# Altium PCB bh_carrier_0_beta.PcbDoc (part 2 of 2)
Units mm, origin at the board's own origin, x right, y up, seen from the top; angles counter-clockwise.
Board outline 100 x 60 mm, 2 copper layers (Top Layer, Bottom Layer); 128 components, 129 nets, 524 pads, 190 vias.
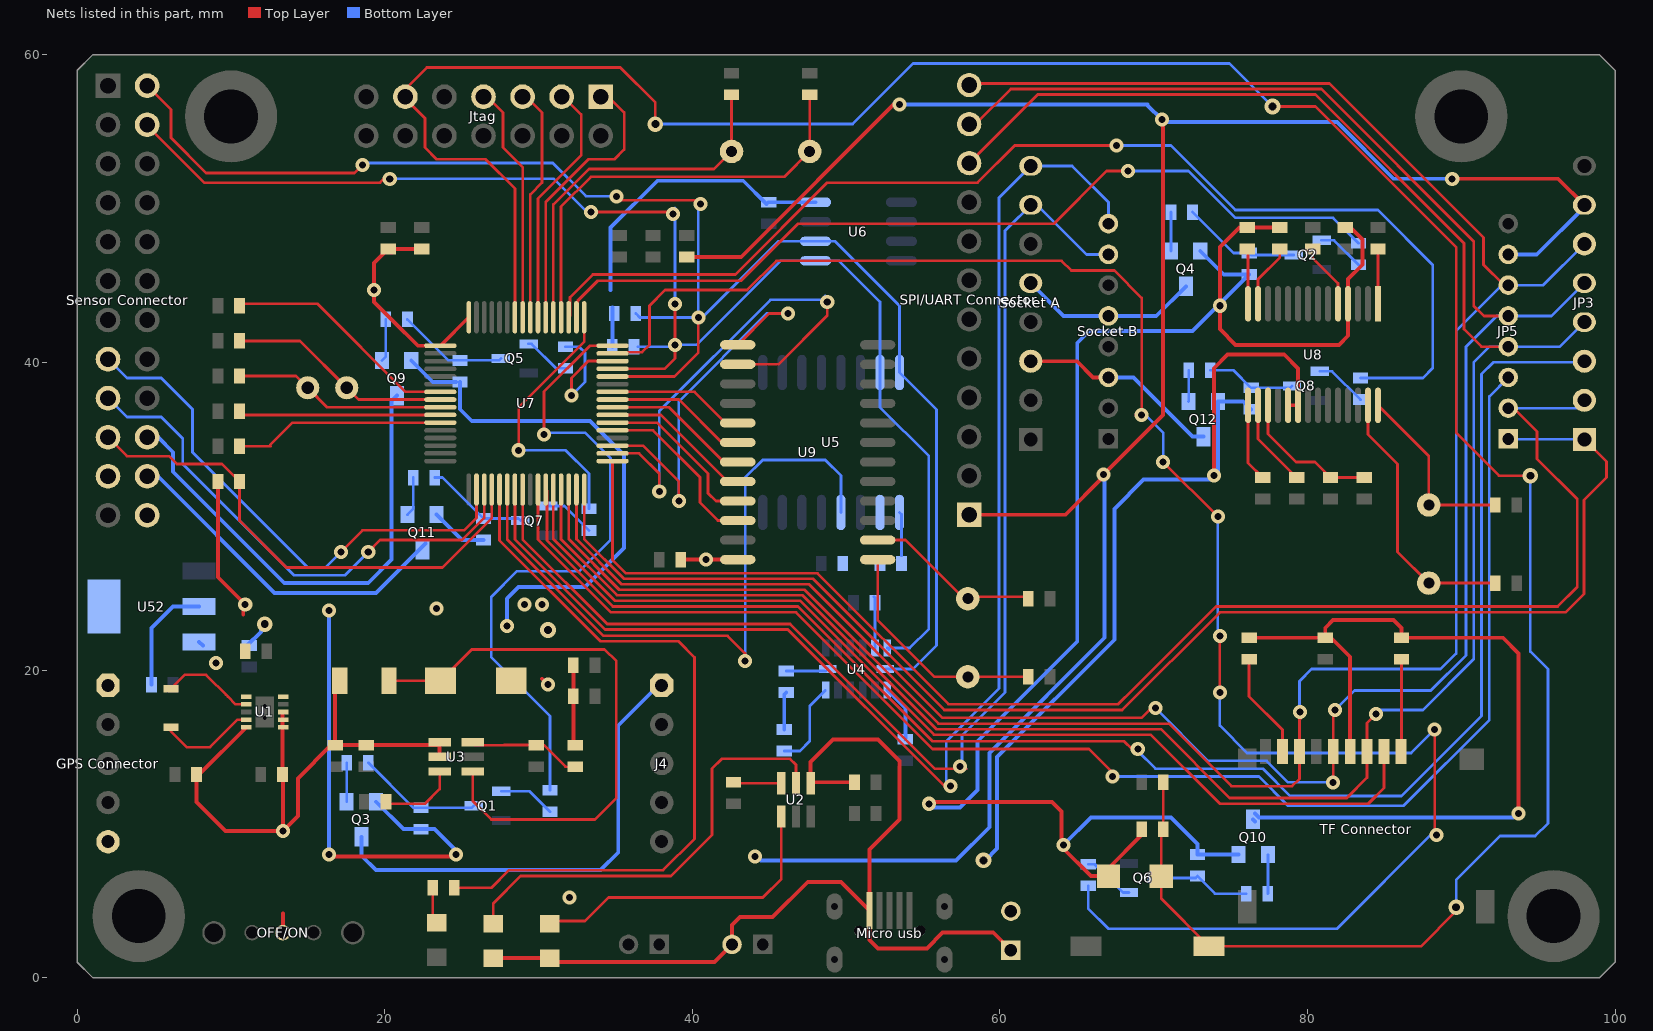
[diagram p2: the nets of this part, all layers, seen from the top]

## Via types
v1: diameter 0.914, hole 0.457, Top Layer to Bottom Layer, 171 vias
v2: diameter 1.016, hole 0.508, Top Layer to Bottom Layer, 17 vias
v3: diameter 1, hole 1, Top Layer to Bottom Layer, 2 vias

## Nets (pads, with @x,y where several pads share a name; then routed paths per layer and width w, separated by ;. In a path a pad name is that pad's centre, name@x,y a point inside that pad or via, vN(x,y) a via of type N, cw(c..) or ccw(c..) an arc to the next point about the centre after c; other vN are vias at no path point) (continued)
IO7: "Sensor Connector.15" U7.18 | length 34.4
  Top Layer w0.178: v1(17.145,27.686) 18.542,29.083 25.146,29.083 25.96,29.897 U7.18@25.96,31.738
  Bottom Layer w0.178: 2,40.22 3.231,38.989 5.461,38.989 7.493,36.957 7.493,34.163 14.986,26.67 16.129,26.67 v1(17.145,27.686)
IO8: "Sensor Connector.17" U7.19 | length 33.6
  Top Layer w0.178: v1(18.923,27.686) 19.685,28.448 25.019,28.448 26.46,29.889 U7.19@26.46,31.738
  Bottom Layer w0.178: 2,37.68 3.231,36.449 5.461,36.449 6.858,35.052 6.858,33.401 14.097,26.162 17.399,26.162 v1(18.923,27.686)
IO_0: "Socket A.7" "Socket B.7" U7.24 | length 83.7
  Top Layer w0.178: U7.24@28.96,31.738 28.96,28.49 34.463,22.987 46.355,22.987 55.753,13.589 v1@57.785,13.589
  Bottom Layer w0.178: v1(57.404,13.716) v1@57.658,13.716 ; v1@57.785,13.589 57.531,13.843 57.531,15.748 60.325,18.542 60.325,48.565 62.205,50.444 65.624,47.025 67.051,47.025
IO_1: "Socket A.8" "Socket B.8" U7.23 | length 89.2
  Top Layer w0.178: U7.23@28.46,31.738 28.46,28.487 34.316,22.631 46.203,22.631 56.388,12.446 v1@56.884,12.446 ; 62,52.484 62,52.78 62.296,52.78
  Bottom Layer w0.178: v1@56.896,12.319 56.515,12.7 56.515,15.367 59.944,18.796 59.944,48.443 59.933,48.454 59.933,50.713 62,52.78 64.695,52.78 67.056,50.419 67.056,49.025
  other v1: 56.769,12.446
LED1: R25.2 U7.21 | length 47.9
  Top Layer w0.178: R25.2@24.514,5.842 26.924,5.842 28.067,6.985 38.1,6.985 40.132,9.017 40.132,20.828 39.091,21.869 34.011,21.869 27.46,28.42 U7.21@27.46,31.738
NetC11_2: C11.2 U7.52 XT1.1 | length 28.8
  Top Layer w0.178: U7.52@31.46,42.938 31.46,50.129 33.401,52.07 45.974,52.07 XT1.1@47.625,53.721 ; XT1.1@47.625,53.47 XT1.1@47.625,53.721 ; C11.2@47.625,57.404 C11.2@47.625,57.401 XT1.1@47.625,53.721
NetC13_2: C13.2 U7.53 XT1.2 | length 24.3
  Top Layer w0.178: U7.53@30.96,42.938 30.96,50.264 33.274,52.578 41.402,52.578 XT1.2@42.545,53.721 C13.2@42.545,57.401 C13.2@42.545,57.655
NetC15_1: 
NetC19_2: C19.2 U7.8 XT2.2 | length 14.8
  Top Layer w0.178: C19.2@10.544,41.656 10.798,41.402 14.478,41.402 XT2.2@17.526,38.354 18.292,37.588 U7.8@23.61,37.588
NetC21_2: C21.2 U7.9 XT2.1 | length 14.4
  Top Layer w0.178: C21.2@10.544,39.116 C21.2@10.798,39.37 ; C21.2@10.544,39.37 10.798,39.116 14.224,39.116 XT2.1@14.986,38.354 16.252,37.088 U7.9@23.61,37.088
NetC22_1: C22.1 U8.28 XT4.2 | length 12.2
  Top Layer w0.178: U8.28@84.582,37.215 87.884,33.913 XT4.2@87.884,30.734 C22.1@92.202,30.734
NetC23_1: C23.1 U9.1 XT3.2 | length 15.2
  Top Layer w0.178: U9.1@52.048,27.178 52.048,23.263 55.753,19.558 XT3.2@57.912,19.558 C23.1@61.846,19.558
NetC26_2: C26.2 U9.2 XT3.1 | length 11.4
  Top Layer w0.178: U9.2@52.048,28.448 53.848,28.448 57.658,24.638 XT3.1@57.912,24.638 58.039,24.765 C26.2@61.846,24.765
NetC28_1: C28.1 U8.27 XT4.1 | length 17.5
  Top Layer w0.178: U8.27@83.932,37.215 83.932,35.321 85.852,33.401 85.852,27.686 XT4.1@87.884,25.654 C28.1@92.202,25.654
NetC30_2: C30.2 R35.2 U8.17 | length 9.3
  Top Layer w0.178: U8.17@77.432,37.215 77.432,35.344 79.248,33.528 80.479,33.528 R35.2@81.492,32.515 C30.2@83.693,32.515
NetD1_K: D1.K U2.1 | length 20.5
  Top Layer w0.178: D1.K@30.734,3.505 30.912,3.683 33.02,3.683 34.544,5.207 44.577,5.207 45.786,6.416 U2.1@45.786,10.482 U2.1@45.786,10.277
NetD2_K: D2.K U2.5 | length 28.8
  Top Layer w0.178: D2.K@27.051,3.505 27.051,4.826 28.829,6.604 38.608,6.604 41.275,9.271 41.275,13.589 41.91,14.224 46.355,14.224 46.736,13.843 U2.5@46.736,12.632
NetD3_1: D3.1 L2.2 U3.1 | length 37.2
  Top Layer w0.178: L2.2@20.269,19.304 D3.1@23.622,19.304 25.654,21.336 34.29,21.336 35.052,20.574 35.052,11.684 33.655,10.287 26.924,10.287 25.713,11.498 U3.1@25.713,13.401
NetD4_A: D4.A R25.1 | length 2.4
  Top Layer w0.178: R25.1@23.114,5.842 23.114,3.81 D4.A@23.368,3.556
NetL1_1: L1.1 U1.2 | length 6.3
  Top Layer w0.178: L1.1@6.098,18.781 6.098,18.798 6.985,19.685 8.382,19.685 9.796,18.271 ; 9.652,18.415 9.796,18.271 ; U1.2@10.99,17.772 10.295,17.772 9.796,18.271
NetL1_2: L1.2 U1.4 | length 6.3
  Top Layer w0.178: L1.2@6.094,16.271 6.094,16.004 7.112,14.986 8.636,14.986 10.422,16.772 U1.4@10.99,16.772
NetQ1_1: Q1.1 R5.2 | length 3.7
  Bottom Layer w0.178: Q1.1@27.576,12.12 29.406,12.12 R5.2@30.74,10.786
NetQ1_3: Q1.3 R1.2 R3.2 | length 8.5
  Bottom Layer w0.178: R1.2@18.926,13.97 21.844,11.052 R3.2@22.352,11.052 ; R3.2@21.971,11.052 R3.2@22.352,11.052 ; Q1.3@25.776,11.17 25.658,11.052 22.86,11.052 22.479,11.052 R3.2@22.352,11.052
NetQ2_1: Q2.1 R6.2 | length 3.1
  Bottom Layer w0.178: Q2.1@80.91,47.94 81.724,47.94 R6.2@83.312,46.352
NetQ2_3: Q2.3 R2.2 R4.2 | length 7.7
  Bottom Layer w0.178: R2.2@72.526,49.778 75.184,47.12 R4.2@76.2,47.12 76.33,46.99 Q2.3@79.11,46.99
NetQ3_1: Q3.1 R1.1 | length 2.5
  Bottom Layer w0.178: Q3.1@17.52,11.436 17.526,11.442 R1.1@17.526,13.97
NetQ4_1: Q4.1 R2.1 | length 2.5
  Bottom Layer w0.178: Q4.1@71.12,47.244 71.12,49.772 R2.1@71.126,49.778
NetQ5_1: Q5.1 R19.2 | length 3.1
  Bottom Layer w0.178: Q5.1@29.348,41.209 29.53,41.209 31.118,39.621 R19.2@31.75,39.621
NetQ5_3: Q5.3 R10.2 R15.2 | length 7.2
  Bottom Layer w0.178: R10.2@21.466,42.799 24.13,40.135 R15.2@24.892,40.135 27.424,40.135 Q5.3@27.548,40.259
NetQ6_1: Q6.1 R20.2 | length 3.4
  Bottom Layer w0.178: R20.2@65.735,7.369 66.164,7.369 68.006,5.527 Q6.1@68.391,5.527
NetQ6_3: Q6.3 R11.2 R16.2 | length 6.4
  Bottom Layer w0.178: Q6.3@70.191,6.477 72.723,6.477 R16.2@72.847,6.601 73.987,5.461 R11.2@76.019,5.461
NetQ7_1: Q7.1 R21.2 | length 3.3
  Bottom Layer w0.178: Q7.1@30.618,30.668 31.686,30.668 R21.2@33.274,29.08
NetQ7_3: Q7.3 R12.2 R17.2 | length 6.9
  Bottom Layer w0.178: R12.2@23.244,32.512 23.752,32.512 R17.2@26.416,29.848 28.688,29.848 Q7.3@28.818,29.718 ; Q7.3@28.942,29.848 Q7.3@29.072,29.718
NetQ8_1: Q8.1 R22.2 | length 3.4
  Bottom Layer w0.178: Q8.1@80.789,39.425 81.603,39.425 R22.2@83.445,37.583
NetQ8_3: Q8.3 R13.2 R18.2 | length 5.8
  Bottom Layer w0.178: R13.2@73.669,39.491 75.193,39.491 R18.2@76.333,38.351 78.865,38.351 Q8.3@78.989,38.475
NetQ9_1: Q9.1 R10.1 | length 2.8
  Bottom Layer w0.178: Q9.1@19.812,40.132 20.066,40.386 R10.1@20.066,42.799
NetQ10_1: Q10.1 R11.1 | length 2.5
  Bottom Layer w0.178: R11.1@77.419,5.461 77.425,5.467 Q10.1@77.425,7.995
NetQ11_1: Q11.1 R12.1 | length 2.6
  Bottom Layer w0.178: Q11.1@21.468,30.105 21.844,30.481 R12.1@21.844,32.512
NetQ12_1: Q12.1 R13.1 | length 2
  Bottom Layer w0.178: Q12.1@72.263,37.465 72.269,37.471 R13.1@72.269,39.491
NetR7_2: R7.2 U2.6 | length 3.1
  Top Layer w0.178: R7.2@42.672,12.703 42.743,12.632 U2.6@45.786,12.632
NetR14_1: R14.1 R24.2 U3.3 | length 7.3
  Top Layer w0.178: U3.3@25.713,15.301 25.898,15.116 27.736,15.116 27.746,15.126 29.835,15.126 R24.2@29.845,15.116 30.35,15.116 31.75,13.716 R14.1@32.385,13.716
NetR23_2: R23.2 U3.6 | length 5
  Top Layer w0.178: R23.2@20.069,11.303 22.606,11.303 23.563,12.26 U3.6@23.563,13.401
NetR27_2: R27.2 U4.6 | length 5.6
  Bottom Layer w0.178: R27.2@45.974,14.729 46.987,14.729 47.625,15.367 47.625,17.647 U4.6@48.641,18.663
NetR28_1: R28.1 U5.1 | length 2.9
  Bottom Layer w0.178: U5.1@53.467,30.248 53.594,30.121 53.594,27.432
NetR29_1: R29.1 U4.12 | length 3.4
  Bottom Layer w0.178: R29.1@51.816,24.765 51.873,24.708 U4.12@51.873,21.437
NetR30_2: R30.2 U4.7 | length 2.8
  Bottom Layer w0.178: R30.2@46.101,19.942 48.678,19.942 U4.7@48.802,20.066
NetR33_1: R33.1 U8.1 | length 3.6
  Top Layer w0.178: U8.1@84.582,43.815 R33.1@84.582,47.371
NetR34_1: R34.1 U8.5 | length 4.2
  Top Layer w0.178: R34.1@80.328,47.371 80.328,46.799 81.982,45.145 U8.5@81.982,43.815
NetR37_1: R37.1 U8.13 | length 4.1
  Top Layer w0.178: U8.13@76.782,43.815 76.782,45.413 78.2,46.831 R37.1@78.2,47.371
NetR38_2: R38.2 U8.16 | length 5.7
  Top Layer w0.178: U8.16@76.782,37.215 76.782,35.023 R38.2@79.29,32.515
NetR39_1: R39.1 U8.14 | length 3.6
  Top Layer w0.178: R39.1@76.073,47.371 76.132,47.312 U8.14@76.132,43.815
NetR40_2: R40.2 U8.15 | length 5.1
  Top Layer w0.178: U8.15@76.132,37.215 76.132,33.472 R40.2@77.089,32.515
NetR41_2: "TF Connector.1" R41.2 | length 6
  Top Layer w0.178: 86.07,14.702 86.106,14.738 R41.2@86.106,20.698
NetR42_2: "TF Connector.8" R42.2 | length 6.9
  Top Layer w0.178: R42.2@76.2,20.698 76.2,18.288 78.37,16.118 78.37,14.702
ONE_WIRE: "Sensor Connector.19" R36.2 U7.20 | length 33.1
  Top Layer w0.178: 2,35.14 3.231,33.909 5.969,33.909 6.477,33.401 9.401,33.401 R36.2@10.544,32.258 10.544,29.715 13.589,26.67 23.749,26.67 26.96,29.881 U7.20@26.96,31.738
POWER_C0: R19.1 U7.46 | length 8.9
  Top Layer w0.178: v1(32.131,37.846) 32.131,38.989 33.23,40.088 U7.46@34.81,40.088
  Bottom Layer w0.178: R19.1@31.75,41.021 32.639,41.021 33.02,40.64 33.02,38.735 v1(32.131,37.846)
POWER_C1: R20.1 U7.47 | length 119.2
  Top Layer w0.178: U7.47@34.81,40.588 34.893,40.671 36.734,40.671 37.211,41.148 37.211,43.688 38.227,44.704 43.561,44.704 45.466,46.609 64.008,46.609 64.643,45.974 67.437,45.974 69.215,44.196 v1(69.215,36.576) v1@68.834,36.576 ; v1(70.612,33.528) v1(74.168,29.972) ; v1(74.295,18.542) v1(74.295,22.225) ; v1(88.265,16.129) 88.265,9.398 v1(88.392,9.271)
  Bottom Layer w0.178: R20.1@65.735,5.969 65.735,4.496 67.056,3.175 81.915,3.175 v1@88.201,9.461 ; v1(69.215,36.576) 69.469,36.576 70.612,35.433 v1(70.612,33.528) ; v1(74.168,29.972) 74.168,22.225 v1(74.295,22.225) ; v1(74.295,18.542) 74.295,16.383 76.073,14.605 86.741,14.605 v1(88.265,16.129)
POWER_C2: R5.1 U7.48 | length 43.3
  Top Layer w0.178: v1(30.353,35.306) 30.353,38.1 33.341,41.088 U7.48@34.81,41.088
  Bottom Layer w0.178: v1@30.353,35.433 33.02,35.433 34.671,33.782 34.671,28.448 32.639,26.416 28.575,26.416 26.924,24.765 26.924,20.828 30.74,17.012 30.74,13.462 ; R5.1@30.74,12.186 30.74,13.462 ; 30.74,14.472 30.74,13.462
POWER_C3: R21.1 U7.49 | length 18
  Top Layer w0.178: v1(28.702,34.29) 28.702,37.084 32.96,41.342 U7.49@32.96,42.938
  Bottom Layer w0.178: v1(28.702,34.29) 30.607,34.29 ; 30.48,34.29 30.607,34.29 ; R21.1@33.274,30.48 33.274,32.766 31.75,34.29 30.607,34.29
POWER_C4: R6.1 U7.50 | length 57.3
  Top Layer w0.178: U7.50@32.46,42.938 32.543,43.021 32.543,44.011 33.846,45.314 43.155,45.314 46.86,49.019 46.863,49.022 63.5,49.022 66.929,52.451 v1(68.326,52.451)
  Bottom Layer w0.178: v1(68.326,52.451) 72.263,52.451 75.311,49.403 81.661,49.403 R6.1@83.312,47.752
POWER_C5: R22.1 U7.51 | length 76.4
  Top Layer w0.178: U7.51@31.96,42.938 32.043,43.021 32.043,44.235 33.528,45.72 42.799,45.72 48.768,51.689 58.547,51.689 60.96,54.102 v1(67.564,54.102)
  Bottom Layer w0.178: v1(67.564,54.102) 71.115,54.102 75.306,49.911 84.582,49.911 88.138,46.355 88.138,39.624 87.497,38.983 R22.1@83.445,38.983
RST: C15.1 D5.1 Jtag.11 R26.1 Reset.2 U7.58 | length 177.6
  Top Layer w0.178: U7.58@28.46,42.938 28.46,51.309 26.556,53.213 23.368,53.213 22.606,53.975 22.606,55.88 21.018,57.468 22.733,59.182 35.306,59.182 37.592,56.896 v2(37.592,55.499) ; C15.1@70.612,12.7 R26.1@70.612,9.652 70.485,9.525 D5.1@70.485,6.604 70.485,5.143 Reset.2@73.596,2.032 87.376,2.032 89.662,4.318 v2(89.662,4.572) ; v2@77.597,56.515 v2(77.724,56.642) 80.518,56.642 89.662,47.498 89.662,35.433 92.456,32.639 v2(94.488,32.639)
  Bottom Layer w0.178: v2(37.592,55.499) 50.419,55.499 54.356,59.436 74.93,59.436 v2(77.724,56.642) ; v2(89.662,4.572) 89.662,6.35 92.513,9.201 94.799,9.201 95.631,10.033 95.631,20.066 94.488,21.209 v2(94.488,32.639)
RTC_RST: U5.4 U7.22 | length 43.7
  Top Layer w0.178: U7.22@27.96,31.738 27.96,28.484 34.219,22.225 42.291,22.225 43.434,21.082 v1(43.434,20.574)
  Bottom Layer w0.178: v1(43.434,20.574) 43.434,32.512 44.577,33.655 48.641,33.655 49.657,32.639 U5.4@49.657,30.248
RXD0: JP3.2 JP5.2 U7.33 | length 95.6
  Top Layer w0.178: U7.33@34.81,33.588 34.81,27.166 35.687,26.289 48.133,26.289 56.642,17.78 67.691,17.78 68.644,18.732 68.649,18.732 74.046,24.13 96.266,24.13 97.536,25.4 97.536,31.115 94.928,33.723 94.928,35.501 93.404,37.025 JP5.2@93.051,37.025
  Bottom Layer w0.178: JP5.2@93.051,37.025 94.615,37.025 ; 94.051,37.025 94.615,37.025 ; JP3.2@98,37.54 97.485,37.025 94.615,37.025
RXD1: U7.35 U9.13 | length 26.6
  Top Layer w0.178: U7.35@34.81,34.588 36.786,34.588 39.116,32.258 v1(39.116,30.988) ; U9.13@42.948,41.148 44.98,43.18 v1(46.228,43.18)
  Bottom Layer w0.178: v1(39.116,30.988) 39.116,37.465 44.831,43.18 v1(46.228,43.18)
SCL: "Sensor Connector.2" R32.1 U4.14 U5.16 U6.6 U7.44 | length 105.1
  Top Layer w0.178: 4.54,58 6.096,56.444 6.096,54.61 8.382,52.324 18.034,52.324 v1(18.542,52.832) ; U7.44@34.81,39.088 38.834,39.088 40.386,40.64 v1(40.386,42.926) ; v1(35.052,50.8) 35.306,50.546 40.386,50.546 40.513,50.419 v1(40.513,50.292)
  Bottom Layer w0.178: v1@18.682,52.972 30.921,52.972 33.08,50.813 35.039,50.813 v1(35.052,50.8) ; R32.1@36.322,43.18 36.576,42.926 v1(40.386,42.926) 40.386,50.546 40.513,50.419 v1(40.513,50.292) ; v1@40.513,42.799 45.593,47.879 U6.6@48.006,47.879 49.276,47.879 53.467,43.688 U5.16@53.467,39.348 55.88,36.935 55.88,21.59 54.356,20.066 U4.14@52.544,20.066
SCLK: "SPI/UART Connector.11" "TF Connector.5" JP3.5 JP5.5 U7.31 | length 149.2
  Top Layer w0.178: U7.31@32.46,31.738 32.46,28.51 35.392,25.578 47.574,25.578 56.261,16.891 69.215,16.891 69.85,17.526 v1(70.104,17.526) ; 58,55.498 58.419,55.498 60.706,57.785 80.899,57.785 90.805,47.879 90.805,43.688 91.468,43.025 JP5.5@93.051,43.025 ; v1(81.661,12.7) 81.67,12.709 81.67,14.702 81.67,17.027 81.915,17.272 v1(81.788,17.399) ; JP3.5@97.484,45.16 JP3.5@98,45.16
  Bottom Layer w0.178: v1(70.104,17.526) 73.533,14.097 77.343,14.097 78.74,12.7 v1(81.661,12.7) ; v1(81.788,17.399) 81.915,17.272 81.915,17.526 83.058,18.669 88.011,18.669 90.297,20.955 90.297,41.021 92.301,43.025 95.865,43.025 JP3.5@98,45.16
SD_CS: "TF Connector.2" U7.28 | length 67.2
  Top Layer w0.178: U7.28@30.96,31.738 30.96,28.502 34.951,24.511 46.99,24.511 55.702,15.799 69.799,15.799 74.295,11.303 83.947,11.303 84.97,12.326 84.97,14.702
SDA: "Sensor Connector.4" R31.1 U4.13 U5.15 U6.5 U7.45 | length 97.7
  Top Layer w0.178: 4.54,55.46 4.54,55.404 8.255,51.689 19.685,51.689 20.193,52.197 20.32,52.07 v1(20.32,51.943) ; v1(33.401,49.784) 33.401,50.038 33.655,49.784 38.862,49.784 v1(38.735,49.657) ; U7.45@34.81,39.588 38.191,39.588 38.862,40.259 v1(38.862,41.148) v1(38.862,43.802)
  Bottom Layer w0.178: v1@20.193,52.197 20.447,51.943 30.988,51.943 33.147,49.784 33.401,50.038 v1(33.401,49.784) ; v1(20.32,51.943) v1@20.32,52.07 ; R31.1@36.449,41.021 38.735,41.021 v1(38.862,41.148) 40.259,41.148 45.72,46.609 U6.5@48.006,46.609 49.53,46.609 52.197,43.942 U5.15@52.197,39.348 52.197,37.084 55.372,33.909 55.372,22.681 54.128,21.437 U4.13@52.673,21.437 U4.13@52.774,21.336 ; v1(38.862,43.802) v1@38.862,50.038
SIMO: "SPI/UART Connector.10" "TF Connector.3" JP3.4 JP5.4 U7.29 | length 150
  Top Layer w0.178: U7.29@31.46,31.738 31.46,28.504 35.098,24.867 47.142,24.867 55.855,16.154 70.46,16.154 74.93,11.684 82.55,11.684 83.87,13.004 83.87,14.702 ; 58,52.958 62.459,57.417 80.505,57.417 90.17,47.752 90.17,42.164 91.309,41.025 JP5.4@93.051,41.025 ; 83.947,14.779 83.87,14.702 ; v1(84.455,17.145) 83.87,16.56 83.87,14.702
  Bottom Layer w0.178: v1(84.455,17.145) 84.709,17.399 87.503,17.399 90.805,20.701 90.805,40.005 91.825,41.025 96.405,41.025 JP3.4@98,42.62
SOCKET0_CS: JP3.3 U7.27 | length 102.5
  Top Layer w0.178: U7.27@30.46,31.738 30.543,31.655 30.543,28.415 34.829,24.13 46.858,24.13 55.621,15.367 68.072,15.367 68.58,14.859 v1(68.961,14.859)
  Bottom Layer w0.178: v1(68.961,14.859) 68.961,14.732 70.104,13.589 77.089,13.589 78.867,11.811 86.106,11.811 91.313,17.018 91.313,39.243 92.075,40.005 97.925,40.005 JP3.3@98,40.08
SOCKET1_CS: JP5.3 U7.26 | length 97.6
  Top Layer w0.178: U7.26@29.96,31.738 29.96,28.496 34.707,23.749 46.736,23.749 55.626,14.859 65.786,14.859 67.31,13.335 v1(67.31,13.081)
  Bottom Layer w0.178: v1(67.31,13.081) 76.835,13.081 78.74,11.176 86.233,11.176 91.821,16.764 91.821,29.083 ; 91.821,29.21 91.821,29.083 ; JP5.3@93.051,39.025 91.821,37.796 91.821,29.083
SOMI: "SPI/UART Connector.12" "TF Connector.7" JP3.6 JP5.6 U7.30 | length 149.1
  Top Layer w0.178: U7.30@31.96,31.738 31.96,28.507 35.245,25.222 47.295,25.222 56.007,16.51 70.993,16.51 75.057,12.446 78.994,12.446 79.47,12.922 79.47,14.702 ; 58,58.038 58.102,58.141 81.432,58.141 91.44,48.133 91.44,46.355 92.77,45.025 JP5.6@93.051,45.025 ; 79.502,14.734 79.47,14.702 ; v1(79.502,17.272) 79.502,16.828 79.47,16.796 79.47,14.702
  Bottom Layer w0.178: v1(79.502,17.272) 79.502,16.828 79.47,16.796 79.47,19.272 80.264,20.066 88.646,20.066 89.662,21.082 89.662,42.037 92.65,45.025 95.325,45.025 JP3.6@98,47.7
SRADD0: U7.40 U9.19 | length 9.6
  Top Layer w0.178: U7.40@34.81,37.088 38.477,37.088 42.037,33.528 U9.19@42.948,33.528
SRADD1: U7.41 U9.18 | length 9.3
  Top Layer w0.178: U7.41@34.81,37.588 39.12,37.588 41.91,34.798 U9.18@42.948,34.798
SRADD2: U7.42 U9.17 | length 9
  Top Layer w0.178: U7.42@34.81,38.088 40.144,38.088 42.164,36.068 U9.17@42.948,36.068
STADD0: U7.37 U9.22 | length 11.5
  Top Layer w0.178: U7.37@34.81,35.588 37.437,35.588 40.488,32.537 40.488,32.125 40.488,31.299 40.488,30.886 41.656,29.718 U9.22@42.948,29.718
STADD1: U7.38 U9.21 | length 11
  Top Layer w0.178: U7.38@34.81,36.088 37.699,36.088 41.021,32.766 41.021,31.496 41.529,30.988 U9.21@42.948,30.988
STADD2: U7.39 U9.20 | length 9.9
  Top Layer w0.178: U7.39@34.81,36.588 37.961,36.588 42.291,32.258 U9.20@42.948,32.258
TCK: Jtag.7 U7.57 | length 15.9
  Top Layer w0.178: Jtag.7@26.416,57.785 26.416,57.531 27.686,56.261 27.686,53.975 28.96,52.701 U7.57@28.96,42.938
TDI: Jtag.3 U7.55 | length 16.5
  Top Layer w0.178: U7.55@29.96,42.938 29.96,50.661 32.766,53.467 32.766,56.134 31.496,57.404 Jtag.3@31.496,57.785
TDO: Jtag.1 U7.54 | length 18.6
  Top Layer w0.178: U7.54@30.46,42.938 30.46,50.419 33.254,53.213 34.925,53.213 35.56,53.848 35.56,56.261 Jtag.1@34.036,57.785
TMS: Jtag.5 U7.56 | length 15.7
  Top Layer w0.178: Jtag.5@28.956,57.785 28.956,57.531 30.226,56.261 30.226,51.693 29.46,50.927 U7.56@29.46,42.938
TXD0: JP3.1 JP5.1 U7.32 | length 92.2
  Top Layer w0.178: U7.32@32.96,31.738 32.96,28.513 35.54,25.933 47.848,25.933 56.383,17.399 67.945,17.399 74.295,23.749 96.774,23.749 97.975,24.95 97.975,31.046 99.441,32.512 99.441,33.559 JP3.1@98,35 JP3.1@97.975,35.025
  Bottom Layer w0.178: JP5.1@93.051,35.025 93.076,35 JP3.1@98,35
TXD1: U7.34 U9.14 | length 31.8
  Top Layer w0.178: U7.34@34.81,34.088 36.524,34.088 37.846,32.766 v1(37.846,31.623) ; U9.14@42.948,39.878 45.593,39.878 48.768,43.053 v1(48.768,43.942)
  Bottom Layer w0.178: 37.846,32.131 37.846,36.83 45.085,44.069 48.387,44.069 48.641,44.323 48.768,44.196 v1(48.768,43.942)
VBUS: "GPS Connector.5" "Sensor Connector.21" "SPI/UART Connector.1" C4.2 C5.2 C9.1 C10.1 JP3.7 JP5.7 L2.1 OFF/ON.2 R8.2 U1.5 U1.6 U1.7 U1.8 U3.4 U3.5 | length 189.5
  Top Layer w0.254: 2,32.48 2,32.6 2.198,32.6 ; U1.5@10.99,16.272 7.926,13.208 C5.2@7.75,13.208 7.75,11.427 9.652,9.525 v1(13.367,9.525) ; OFF/ON.2@13.367,2.921 13.367,4.159 ; U1.8@13.394,17.272 13.338,17.216 C4.2@13.338,13.208 13.367,13.179 v1(13.367,9.525) ; L2.1@17.069,19.304 16.764,18.999 C9.1@16.764,15.113 ; U3.5@23.563,14.351 U3.4@23.563,15.301 23.375,15.113 C10.1@18.796,15.113 C9.1@16.764,15.113 ; R8.2@39.624,46.86 43.177,46.86 v1@53.086,56.769 ; 58,30.098 64.261,30.098 v1@66.738,32.575 ; v1(66.738,32.702) 70.612,36.576 v1@70.612,55.793 ; v1(89.408,51.943) 96.297,51.943 JP3.7@98,50.24 JP3.7@97.484,50.24 ; v1(13.367,9.525) 14.351,10.509 14.351,12.954 16.51,15.113 C9.1@16.764,15.113
  Bottom Layer w0.254: OFF/ON.2@13.367,2.921 OFF/ON.2@13.367,3.207 ; 44.45,7.62 57.15,7.62 59.309,9.779 59.309,14.605 66.802,22.098 v1@66.802,32.637 ; v1(53.467,56.769) 69.596,56.769 69.596,56.721 v1(70.525,55.793) 70.691,55.626 81.915,55.626 85.598,51.943 v1(89.408,51.943) ; JP5.7@93.051,47.025 94.904,47.025 98,50.121 JP3.7@98,50.24
  other v1: 32.004,5.207 44.069,7.874
VCC_BASE_3.3V: C1.1 C12.1 C14.1 C16.1 C17.1 C18.1 C27.2 C29.1 C142.1 D5.2 Q3.2 Q4.2 Q10.2 Q11.2 R3.1 R4.1 R16.1 R17.1 R26.2 R27.1 R28.2 R30.1 R31.2 R32.2 R36.1 R37.2 R39.2 U1.1 U1.10 U4.1 U5.2 U6.8 U7.1 U7.64 U8.4 U9.24 U52.2 U52.4 | length 210.2
  Top Layer w0.254: R36.1@9.144,32.258 9.144,26.035 10.795,24.384 10.795,23.622 ; C1.1@10.922,20.955 C1.1@10.922,21.209 C1.1@10.99,21.141 ; v1(16.383,8.001) 16.51,8.001 16.637,7.874 24.511,7.874 v1(24.638,8.001) ; 20.447,42.799 20.574,42.672 ; C14.1@20.447,47.138 C14.1@20.214,47.371 ; C18.1@22.273,47.244 C18.1@22.4,47.371 C14.1@20.214,47.371 ; U7.64@25.46,42.938 U7.1@23.61,41.088 22.158,41.088 20.574,42.672 ; C27.2@39.246,27.178 v1(40.894,27.178) U9.24@42.948,27.178 ; v1(55.372,11.303) 55.499,11.176 55.753,11.43 63.373,11.43 63.999,10.804 v1@63.999,8.636 ; v1@64.008,8.509 65.913,6.604 D5.2@67.056,6.604 67.056,7.112 69.212,9.268 R26.2@69.212,9.652 ; R37.2@78.2,48.771 R39.2@76.073,48.771 75.568,48.771 74.295,47.498 v1(74.295,43.688) 74.295,42.164 75.311,41.148 82.042,41.148 82.632,41.738 U8.4@82.632,43.815 82.632,45.421 83.566,46.355 83.566,48.006 82.801,48.771 C29.1@82.455,48.771 ; C14.1@20.214,47.371 19.304,46.461 v1(19.304,44.704) 19.304,43.942 20.574,42.672
  Bottom Layer w0.254: C142.1@4.826,19.05 4.826,22.733 6.223,24.13 U52.2@7.926,24.13 ; v1(16.383,8.001) v1@16.51,8.001 ; v1(16.383,23.876) 16.383,8.128 v1@16.637,7.874 ; Q3.2@19.425,11.436 21.209,9.652 R3.1@22.352,9.652 23.241,9.652 24.638,8.255 v1(24.638,8.001) ; Q11.2@23.373,30.105 25.03,28.448 R17.1@26.416,28.448 ; 34.671,44.704 34.671,48.768 37.719,51.816 43.307,51.816 C16.1@44.831,50.292 ; R31.2@34.795,41.021 R32.2@34.795,43.561 ; C16.1@44.958,50.419 U6.8@48.006,50.419 ; R27.1@45.974,16.129 45.974,18.415 R30.1@46.101,18.542 ; U4.1@52.673,18.695 53.848,17.52 C12.1@53.848,15.494 ; v1(55.372,11.303) 55.626,11.049 57.404,11.049 58.547,12.192 58.547,15.367 65.024,21.844 65.024,41.275 65.786,42.037 72.517,42.037 R4.1@76.2,45.72 74.549,45.72 Q4.2@73.025,47.244 ; v1(64.135,8.636) 65.913,10.414 71.12,10.414 72.847,8.687 R16.1@72.847,8.001 72.853,7.995 Q10.2@75.52,7.995
  other v1: 23.368,24.003 10.922,24.257 29.083,24.257 30.226,24.257
VCC_BASE_5V: "GPS Connector.1" "Sensor Connector.24" C7.1 C8.1 C132.1 D3.2 DC_Jump.2 Q9.2 Q12.2 R14.2 R15.1 R18.1 U8.19 U8.20 U52.3 | length 99.3
  Top Layer w0.254: D3.2@28.222,19.304 D3.2@28.476,19.05 ; 30.226,19.431 v1(30.607,19.05) ; C7.1@32.131,20.32 32.258,20.193 C8.1@32.258,18.288 32.258,15.497 ; v1(73.914,32.639) 73.914,39.624 74.803,40.513 78.486,40.513 79.382,39.617 U8.20@79.382,37.215 U8.19@78.732,37.215
  Bottom Layer w0.254: U52.3@7.926,21.83 U52.3@8.166,21.59 ; C132.1@11.049,21.59 11.938,22.479 11.938,22.733 12.319,22.733 12.192,22.86 v2(12.192,22.987) ; Q9.2@21.717,40.132 23.114,38.735 R15.1@24.638,38.735 ; R15.1@24.892,38.735 24.892,36.957 25.654,36.195 33.35,36.195 35.56,33.985 35.56,27.94 33.02,25.4 28.702,25.4 27.94,24.638 v1(27.94,22.86) ; v2(58.928,7.62) 59.055,7.62 59.817,8.382 59.817,14.351 67.437,21.971 67.437,30.48 69.342,32.385 73.66,32.385 v1(73.914,32.639) ; v1@74.168,32.893 Q12.2@74.168,37.465 75.819,37.465 R18.1@76.333,36.951
  other v1: 9.017,20.447
  other v2: 30.607,22.606
VCC_GPS_3.3V: J4.1 Q3.3 | length 31.6
  Bottom Layer w0.254: Q3.3@18.491,9.144 18.491,7.925 19.431,6.985 34.036,6.985 35.179,8.128 35.179,16.383 J4.1@38.398,19.602
VCC_SD_3.3V: "TF Connector.4" C31.2 Q10.3 R41.1 R42.1 | length 55.5
  Top Layer w0.254: R42.1@76.2,22.098 C31.2@81.153,22.098 81.153,22.733 81.661,23.241 85.598,23.241 86.106,22.733 R41.1@86.106,22.098 92.71,22.098 93.726,21.082 v1(93.726,10.668) ; C31.2@81.534,22.098 82.77,20.862 82.77,14.702
  Bottom Layer w0.254: Q10.3@76.454,10.287 Q10.3@76.581,10.16 ; Q10.3@76.581,10.668 76.835,10.414 93.37,10.414 93.675,10.719 v1(93.726,10.668)
VCC_SENSOR_3.3V: "Sensor Connector.22" Q11.3 | length 22.6
  Bottom Layer w0.254: 4.54,32.6 5.246,32.6 12.827,25.019 19.431,25.019 Q11.3@22.65,28.238
VCC_SENSOR_5V: "Sensor Connector.20" Q9.3 | length 32
  Bottom Layer w0.254: 4.54,35.14 5.246,35.14 6.223,34.163 6.223,32.893 13.462,25.654 18.923,25.654 20.447,27.178 20.447,37.504 Q9.3@20.783,37.84
VCC_SOCKET_3.3V: "Socket A.5" "Socket B.5" Q4.3 | length 11.8
  Bottom Layer w0.254: 62,45.16 64.135,43.025 66.051,43.025 70.165,43.025 Q4.3@72.091,44.952
VCC_SOCKET_5V: "Socket A.3" "Socket B.3" Q12.3 | length 13.3
  Top Layer w0.254: 62,40.08 64.996,40.08 66.051,39.025 67.051,39.025
  Bottom Layer w0.254: 67.051,39.025 68.671,39.025 72.523,35.173 Q12.3@73.234,35.173
VEREF+: C24.1 U7.10 | length 13.2
  Top Layer w0.178: C24.1@10.544,36.83 10.786,36.588 U7.10@23.61,36.588
VIN: "Micro usb.1" C6.2 D1.A D2.A DC_Jump.1 Solar.2 U2.4 | length 62.2
  Top Layer w0.254: D2.A@27.051,1.27 D1.A@30.734,1.27 30.988,1.016 41.434,1.016 Solar.2@42.577,2.159 42.577,3.41 43.104,3.937 45.212,3.937 47.498,6.223 49.671,6.223 51.522,4.372 ; C6.2@50.543,12.7 47.754,12.7 U2.4@47.686,12.632 47.686,14.031 49.149,15.494 52.07,15.494 53.467,14.097 53.467,10.287 51.522,8.342 51.522,4.372 ; DC_Jump.1@60.706,1.778 59.563,2.921 56.261,2.921 55.245,1.905 52.07,1.905 51.522,2.453 51.522,4.372
VREF+: C20.2 U7.7 | length 15.3
  Top Layer w0.178: C20.2@10.671,43.815 15.621,43.815 21.348,38.088 U7.7@23.61,38.088
VREF-: C25.1 U7.11 | length 13.5
  Top Layer w0.178: C25.1@10.671,34.544 12.573,34.544 ; 12.573,34.671 13.99,36.088 U7.11@23.61,36.088
pads on no net: "Micro usb." "Micro usb.NC" "TF Connector.0" "TF Connector.9" HO1.0 HO2.0 HO3.0 HO4.0 Jtag.2 Jtag.4 Jtag.6 Jtag.8 Jtag.10 Jtag.12 Jtag.13 Jtag.14 OFF/ON.0 OFF/ON.3 U1.V U1.V_2 U4.3 U4.8 U4.9 U4.10 U4.11 U5.3 U5.13 U5.14 U8.2 U8.3 U8.6 U8.8 U8.9 U8.10 U8.11 U8.12 U8.24
copper on no net:
  other v1: 4,1.46 96,1.46 2.247,2.171 94.247,2.171 5.88,2.4 97.88,2.4 1.46,4 6.54,4 93.46,4 98.54,4 6.057,5.6 98.057,5.6 2.095,5.651 94.095,5.651 4,6.54 96,6.54 10,53.46 90,53.46 8.247,54.171 88.247,54.171 11.88,54.4 91.88,54.4 7.46,56 12.54,56 87.46,56 92.54,56 12.057,57.6 92.057,57.6 8.095,57.651 88.095,57.651 10,58.54 90,58.54
  other v3: 78.87,4.202 86.87,4.202

## Keep-outs
Keep-Out Layer:
  the board outline again, w0.254

## Other copper
Top Layer:
  rectangle net VCC_BASE_5V: 11.938,22.479 30.988,23.114
  rectangle net NetD3_1: 20.32,18.669 22.86,19.939
  rectangle net VCC_BASE_3.3V: 13.335,18.288 13.589,19.431
  rectangle net VCC_BASE_3.3V: 10.795,19.431 13.589,19.685
  rectangle net VCC_BASE_3.3V: 10.541,23.749 30.607,24.638
  rectangle net VBUS: 12.954,2.667 13.843,10.033
  rectangle net VCC_BASE_5V: 29.111,17.399 32.258,20.701
  rectangle net VCC_BASE_3.3V: 10.541,18.161 11.117,24.511
  rectangle net VBUS: 0.635,8.255 13.589,8.89
  rectangle net VBUS: 0.381,8.255 0.762,32.766
  rectangle net VBUS: 0.381,32.258 2.159,32.766
  rectangle net VCC_BASE_5V: 1.651,20.32 9.271,20.955
  rectangle net VCC_BASE_5V: 1.651,19.05 2.413,20.828
  rectangle net VCC_BASE_5V: 4.191,20.486 4.858,30.099
  rectangle net VBUS: 31.75,4.953 32.258,6.096
  rectangle net VBUS: 31.75,5.842 44.196,6.223
  rectangle net VBUS: 43.815,5.842 44.323,7.747
  rectangle net VCC_BASE_5V: 60.198,4.191 60.96,7.874
  rectangle net VCC_BASE_5V: 58.674,7.239 60.96,8.001
Bottom Layer:
  rectangle net VCC_BASE_5V: 30.353,18.796 30.988,22.987
  rectangle net VCC_BASE_3.3V: 41.656,18.161 46.228,18.542
  rectangle net VCC_BASE_3.3V: 51.943,30.607 52.451,34.925
  rectangle net VCC_BASE_3.3V: 41.021,34.417 52.451,34.925
  rectangle net VCC_BASE_3.3V: 51.943,26.924 52.451,29.845
  rectangle net VCC_BASE_3.3V: 49.53,26.797 52.194,27.178
  rectangle net VCC_BASE_3.3V: 53.848,15.24 55.372,15.748
  rectangle net VCC_BASE_3.3V: 1.524,23.749 8.001,24.765
  rectangle net VCC_BASE_5V: 11.176,21.717 12.573,23.241
  rectangle net VCC_BASE_5V: 8.763,21.336 11.049,21.844
  rectangle net VCC_BASE_3.3V: 8.255,23.495 11.176,24.765
  rectangle net VCC_BASE_3.3V: 23.241,23.749 23.622,30.48
  rectangle net VCC_BASE_3.3V: 34.544,38.735 34.925,41.148
  rectangle net VCC_BASE_3.3V: 34.798,38.735 35.941,39.116
  rectangle net VCC_BASE_3.3V: 35.941,23.876 36.449,39.116
  rectangle net VCC_BASE_3.3V: 40.767,23.749 41.275,34.925
  rectangle net VCC_BASE_3.3V: 55.118,11.43 55.626,15.748
  rectangle net VCC_BASE_3.3V: 41.021,10.795 55.88,11.684
  rectangle net VCC_BASE_3.3V: 41.021,11.176 42.037,24.13
  rectangle net VCC_BASE_3.3V: 29.083,23.749 42.037,24.638
  rectangle net VCC_BASE_3.3V: 33.909,40.894 34.925,44.831
  rectangle net VCC_BASE_3.3V: 18.796,44.196 34.036,44.831
  rectangle net VCC_BASE_5V: 7.926,20.066 9.652,21.83
  rectangle net VBUS: 12.954,2.667 13.716,5.588
  rectangle net VBUS: 12.954,5.207 32.004,5.588
  rectangle net BAT: 35.433,0.635 36.068,2.413
  rectangle net BAT: 14.986,0.635 36.068,1.27
  rectangle net BAT: 14.986,0.762 15.748,3.048
  rectangle net VCC_BASE_5V: 58.166,6.604 59.182,8.128
  rectangle net VCC_BASE_5V: 40.894,6.604 59.055,7.112
  rectangle net VCC_BASE_5V: 40.767,6.604 41.275,10.033
  rectangle net VCC_BASE_5V: 40.259,9.144 41.148,10.033
  rectangle net VCC_BASE_5V: 40.005,9.144 40.513,22.86
  rectangle net VCC_BASE_5V: 30.353,22.352 40.513,22.86

## Silkscreen, mask and mechanical layers (free items; w line width, h text height)
Top Overlay:
  text "bh_carrier_beta" at 31.623,23.114 h1.52

## Text inside footprints (layer, text, board x,y; h text height)
U4: Mechanical 1 "205" at 50.673,20.066 h0.76 r270; Mechanical 1 "*" at 53.454,17.501 h0.76 r270; Bottom Overlay "*" at 53.454,17.501 h0.76 r270